# Altium PCB PCB1.PcbDoc (part 1 of 2)
Units mil, origin at the board's own origin, x right, y up, seen from the top; angles counter-clockwise.
Board outline 1023.62 x 2244.09 mil, 2 copper layers (Top Layer, Bottom Layer), stack 42.17 mil thick; 66 components, 139 nets, 332 pads, 153 vias.
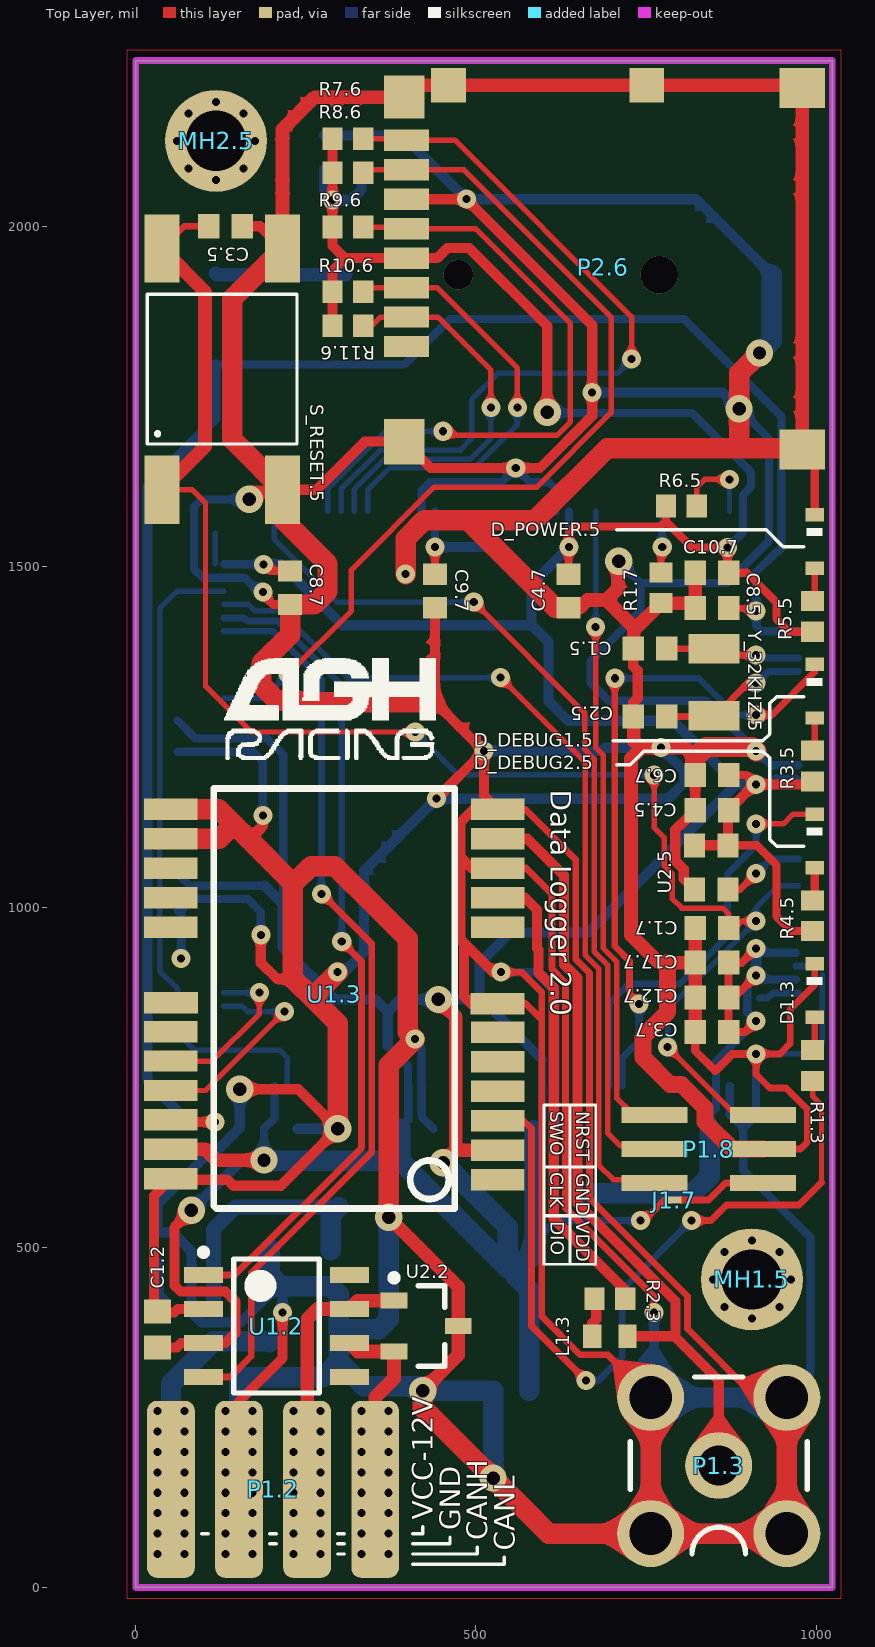
[diagram p0: Top Layer view]
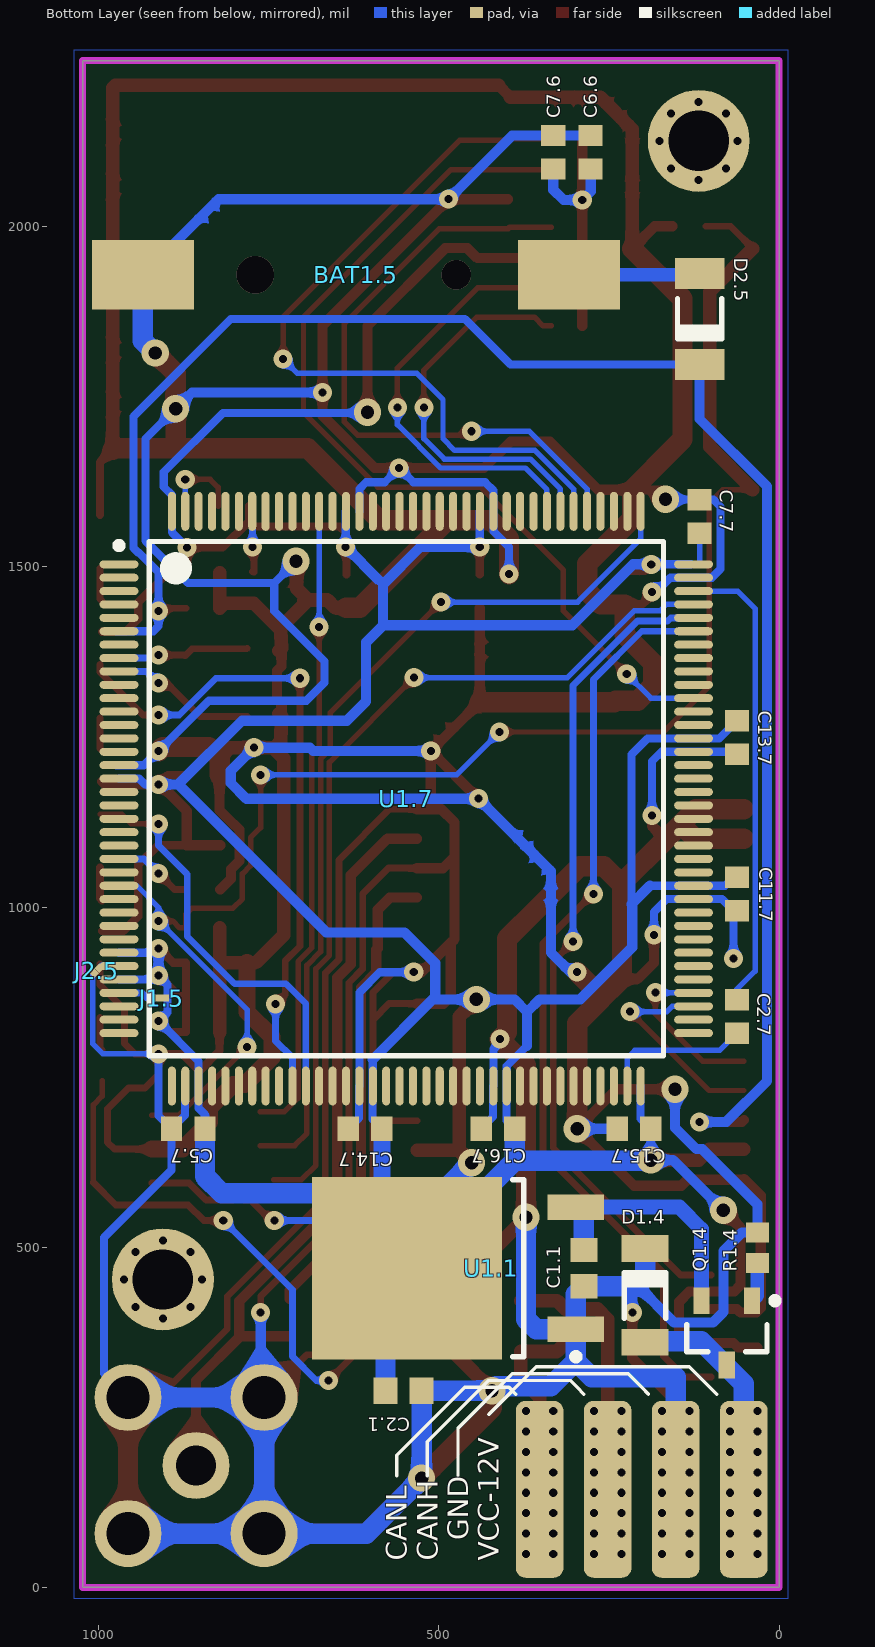
[diagram p1: Bottom Layer view, seen from below]

## Layer stack, top to bottom
Top Solder: solder mask 0.4, Solder Resist, Dk 3.5
Top Layer: signal copper 1.4
Dielectric 1: dielectric 39.3701, FR-4, Dk 4.8
Bottom Layer: signal copper 1.4
Bottom Solder: solder mask 0.4, Solder Resist, Dk 3.5

## Board outline
0,0 1023.62,0 1023.62,2244.09 0,2244.09

## Design rules (kind name [scope] priority, off if disabled: settings)
Clearance [All] p1: gap=10 ignorepadtopadclearanceinfootprint=FALSE except(0: Arc-Hole Track-Hole SMDPad-Hole THPad-Hole Via-Hole Fill-Hole Poly-Hole Region-Hole Text-Hole; 5: Arc-Arc Arc-Track Arc-SMDPad Track-Track Track-SMDPad SMDPad-SMDPad)
ComponentClearance ComponentClearance_1 [IsNetTieComponent] p1: gap=0 collisioncheckmode=3 verticalgap=0 showdistances=FALSE
ComponentClearance [All] p2: gap=10 collisioncheckmode=3 verticalgap=10 showdistances=FALSE
HoleToHoleClearance [All] p1: gap=7 allowstackedmicrovias=TRUE
MinimumSolderMaskSliver [All] p1: minsoldermaskwidth=7
PolygonConnect PolygonConnect_Via [IsVia] p1: connectstyle=Direct reliefconductorwidth=10 reliefentries=4 polygonreliefangle="90 Angle" airgapwidth=10
PolygonConnect PolygonConnect_MH [HasFootprint('MOUNTING HOLE 2mm') or HasFootprint('MOUNTING HOLE 3mm')] p2: connectstyle=Direct reliefconductorwidth=10 reliefentries=4 polygonreliefangle="90 Angle" airgapwidth=10
PolygonConnect [All] p3: connectstyle=Relief reliefconductorwidth=10 reliefentries=4 polygonreliefangle="90 Angle" airgapwidth=10
RoutingVias [All] p1: holewidth=28 width=50 viastyle="Through Hole" minholewidth=28 minwidth=50 maxholewidth=28 maxwidth=50 useviatemplates=TRUE viatemplateguid#1={84326701-4016-4D40-A17F-3868C8D44F5F} viatemplateguid#2={CE5F3209-6210-4098-BA08-8F30989B8E6C} viatemplateguid#3={49E86A22-232E-45D3-8E06-BE319950C1BD} viatemplateguid#4={101CAD5C-0689-4F2F-A512-CBBFEFE64669} viatemplatename#1=v71h30m0mx0 viatemplatename#2=v71h30m71 viatemplatename#3=v102h50m0mx0 viatemplatename#4=v127h70
SilkToSilkClearance [All] p1: silktosilkclearance=3
SilkToSolderMaskClearance [IsPad] p1: minsilkscreentomaskgap=7 clearancetoexposedcopper=TRUE
SolderMaskExpansion [All] p1: expansion=5
Width Width_POWER [InNetClass('POWER')] p1: maxlimit=30 minlimit=8 preferedwidth=15
Width [Not InNetClass('POWER')] p2: maxlimit=20 minlimit=8 preferedwidth=10
25 further rules are at their usual default settings.

## Classes and differential pairs
component class Main: BAT1.5 C1.5 C2.5 C3.5 C4.5 C8.5 D2.5 D_DEBUG1.5 D_DEBUG2.5 D_POWER.5 J1.5 J2.5 MH1.5 MH2.5 R3.5 R4.5 R5.5 R6.5 S_RESET.5 U2.5 Y_32KHZ.5
component class "U_3V3 NCP1117DT33G": C1.1 C2.1 U1.1
component class "U_CAN Transceiver SN65HVD232D": C1.2 P1.2 U1.2 U2.2
component class U_GPS: D1.3 L1.3 P1.3 R1.3 R2.3 U1.3
component class "U_Input Protection": D1.4 Q1.4 R1.4
component class U_MicroSDCard: C6.6 C7.6 P2.6 R7.6 R8.6 R9.6 R10.6 R11.6
component class U_STM32F767ZIT6: C1.7 C2.7 C3.7 C4.7 C5.7 C6.7 C7.7 C8.7 C9.7 C10.7 C11.7 C12.7 C13.7 C14.7 C15.7 C16.7 C17.7 J1.7 R1.7 U1.7
component class "U_SWD Connector": P1.8
net class PA[0..10]: PA0 PA1 PA2 PA3 PA4 PA5 PA6 PA7 PA8 PA9 PA10 PA15
net class PB[0..15]: PB0 PB1 PB2 PB4 PB5 PB6 PB7 PB8 PB9 PB10 PB11 PB12 PB13 PB14 PB15
net class PC[0..13]: PC0 PC1 PC2 PC3 PC4 PC5 PC6 PC7 PC8 PC9 PC10 PC11 PC12 PC13
net class PD[0..15]: PD0 PD1 PD2 PD3 PD4 PD5 PD6 PD7 PD8 PD9 PD10 PD11 PD12 PD13 PD14 PD15
net class PE[0..15]: PE0 PE1 PE2 PE3 PE4 PE5 PE6 PE7 PE8 PE9 PE10 PE11 PE12 PE13 PE14 PE15
net class PF[0..15]: PF0 PF1 PF2 PF3 PF4 PF5 PF6 PF7 PF8 PF9 PF10 PF11 PF12 PF13 PF14 PF15
net class PG[0..15]: PG0 PG1 PG2 PG3 PG4 PG5 PG6 PG7 PG8 PG9 PG10 PG11 PG12 PG13 PG14 PG15
net class POWER: 3V3 GND VBAT VCC VCC_SAFE

## Components (designator, comment, footprint, x,y, rotation, side; value= is the part's Value field where it differs from the comment)
BAT1.5 "Battery" "KEYSTONE 1056" 621.81,1929.25 r0 bottom locked value=3V (schematic designator BAT1)
C1.1 "Cap" CAP_0603_IPC_MD 286.81,469.25 r90 bottom value=10uF (schematic designator C1)
C1.2 "Cap" CAP_0603_IPC_MD 31.81,379.25 r270 top value=100nF (schematic designator C1)
C1.5 "Cap" CAP_0603_IPC_HD 755.81,1380.25 r0 top value=23p (schematic designator C1)
C1.7 "Cap" CAP_0603_IPC_HD 846.81,969.25 r0 top value=100n (schematic designator C1)
C2.1 "Cap" CAP_0603_IPC_MD 551.81,289.25 r0 bottom value=10uF (schematic designator C2)
C2.5 "Cap" CAP_0603_IPC_HD 755.81,1280.25 r0 top value=23p (schematic designator C2)
C2.7 "Cap" CAP_0603_IPC_HD 61.81,839.25 r270 bottom value=2.2uF (schematic designator C2)
C3.5 "Cap" CAP_0603_IPC_HD 132.09,2000.55 r180 top value=100nF (schematic designator C3)
C3.7 "Cap" CAP_0603_IPC_HD 846.81,816.25 r0 top value=100n (schematic designator C3)
C4.5 "Cap" CAP_0603_IPC_HD 846.81,1142.25 r0 top value=100nF (schematic designator C4)
C4.7 "Cap" CAP_0603_IPC_HD 635.81,1464.25 r90 top value=100n (schematic designator C4)
C5.7 "Cap" CAP_0603_IPC_HD 868.2,674.25 r180 bottom value=100n (schematic designator C5)
C6.6 "Cap" CAP_0603_IPC_HD 276.81,2109.25 r270 bottom value=100nF (schematic designator C6)
C6.7 "Cap" CAP_0603_IPC_HD 846.81,1194.25 r0 top value=100n (schematic designator C6)
C7.6 "Cap" CAP_0603_IPC_HD 331.81,2109.25 r270 bottom value=1uF (schematic designator C7)
C7.7 "Cap" CAP_0603_IPC_HD 116.81,1574.25 r270 bottom value=100n (schematic designator C7)
C8.5 "Cap" CAP_0603_IPC_HD 846.81,1439.25 r0 top value=100n (schematic designator C8)
C8.7 "Cap" CAP_0603_IPC_HD 226.81,1469.25 r90 top value=100n (schematic designator C8)
C9.7 "Cap" CAP_0603_IPC_HD 439.81,1464.25 r90 top value=100n (schematic designator C9)
C10.7 "Cap" CAP_0603_IPC_HD 846.81,1491.25 r0 top value=100n (schematic designator C10)
C11.7 "Cap" CAP_0603_IPC_HD 61.81,1019.25 r90 bottom value=100n (schematic designator C11)
C12.7 "Cap" CAP_0603_IPC_HD 846.81,867.25 r0 top value=100n (schematic designator C12)
C13.7 "Cap" CAP_0603_IPC_HD 61.81,1249.25 r90 bottom value=100n (schematic designator C13)
C14.7 "Cap" CAP_0603_IPC_HD 608.2,674.25 r180 bottom value=100n (schematic designator C14)
C15.7 "Cap" CAP_0603_IPC_HD 213.2,674.25 r180 bottom value=100n (schematic designator C15)
C16.7 "Cap" CAP_0603_IPC_HD 413.2,674.25 r180 bottom value=100n (schematic designator C16)
C17.7 "Cap" CAP_0603_IPC_HD 846.81,918.25 r0 top value=100n (schematic designator C17)
D1.3 "LED BLUE" KPA_2106 997.81,877.25 r270 top (schematic designator D_GPS)
D1.4 "TGL34-20CA" DIO_MELF_IPC_MD 196.81,429.25 r270 bottom (schematic designator D1)
D2.5 "Schottky Diode" MiniMELF_IPC_MD 116.81,1864.25 r270 bottom (schematic designator D2)
D_DEBUG1.5 "LED GREEN" KPA_2106 997.81,1317.25 r270 top (schematic designator D_DEBUG1)
D_DEBUG2.5 "LED YELLOW" KPA_2106 997.81,1097.25 r270 top (schematic designator D_DEBUG2)
D_POWER.5 "LED RED" KPA_2106 997.81,1537.25 r270 top (schematic designator D_POWER)
J1.5 "NetTie" NETTIE 906.81,866.25 r0 bottom net-tie (schematic designator J1)
J1.7 "NetTie" NETTIE 791.81,569.25 r0 top net-tie (schematic designator J1)
J2.5 "NetTie" NETTIE 1002.81,906.25 r135 bottom net-tie (schematic designator J2)
L1.3 "Ind" IND_0603_IPC_HD 696.81,369.25 r180 top value=22uH (schematic designator L1)
MH1.5 "Mounting Hole" "MOUNTING HOLE 2mm" 905.51,452.76 r90 top (schematic designator MH1)
MH2.5 "Mounting Hole" "MOUNTING HOLE 2mm" 118.11,2125.98 r90 top (schematic designator MH2)
P1.2 "CAN" WIRE_PADS_4 201.81,144.25 r0 top (schematic designator P1)
P1.3 "SMA Antenna" SMA_PCB_Female_Angle_connector 856.81,179.25 r180 top (schematic designator P1)
P1.8 "SWD" HEADER_2x3_1_27_MALE_SMD 921.81,594.25 r180 top (schematic designator P1)
P2.6 "MicroSD" MICROSDCARD_SOCKET 1012.81,2233.25 r270 top locked (schematic designator P2)
Q1.4 "ZXMP3A13FTA" SOT23_IPC_MD 76.81,374.25 r270 bottom (schematic designator Q1)
R1.3 "Res" RES_0603_IPC_HD 994.81,767.25 r270 top value=1k (schematic designator R1)
R1.4 "Res" RES_0603_IPC_HD 31.81,499.25 r90 bottom value=1k (schematic designator R1)
R1.7 "Res" RES_0603_IPC_HD 771.81,1469.25 r90 top value=10k (schematic designator R1)
R2.3 "Res" RES_0603_IPC_HD 696.81,424.25 r0 top value=22 (schematic designator R2)
R3.5 "Res" RES_0603_IPC_HD 994.81,1207.25 r90 top value=1k (schematic designator R3)
R4.5 "Res" RES_0603_IPC_HD 994.81,987.25 r90 top value=1k (schematic designator R4)
R5.5 "Res" RES_0603_IPC_HD 994.81,1427.25 r270 top value=1k (schematic designator R5)
R6.5 "Res" RES_0603_IPC_HD 801.81,1589.25 r180 top value=1k (schematic designator R6)
R7.6 "Res" RES_0603_IPC_HD 311.81,2129.25 r180 top value=10k (schematic designator R7)
R8.6 "Res" RES_0603_IPC_HD 311.81,2079.25 r180 top value=10k (schematic designator R8)
R9.6 "Res" RES_0603_IPC_HD 311.81,1999.25 r180 top value=10k (schematic designator R9)
R10.6 "Res" RES_0603_IPC_HD 311.81,1904.25 r180 top value=10k (schematic designator R10)
R11.6 "Res" RES_0603_IPC_HD 311.81,1854.25 r180 top value=10k (schematic designator R11)
S_RESET.5 "Switch" Microswitch_SMD_4_3mm 127.09,1790.55 r90 top (schematic designator S_RESET)
U1.1 "NCP1117DT33G" DPAK_IPC_MD 471.81,469.25 r0 bottom locked (schematic designator U1)
U1.2 "SN65HVD232D" SOIC_8_IPC_MD 206.81,384.25 r0 top (schematic designator U1)
U1.3 "GPS NEO-M8" NEO-6M 291.81,864.25 r0 top locked (schematic designator U1)
U1.7 "STM32F767ZIT6" LQFP144_IPC_MD 547.81,1159.25 r180 bottom locked (schematic designator U1)
U2.2 "ESDCAN02-2BWY" SOT23_IPC_MD 426.81,384.25 r0 top (schematic designator U2)
U2.5 "16.00M-IQXO-791" ICLCX18 845.81,1058.25 r270 top (schematic designator U2)
Y_32KHZ.5 "XTAL 32.768kHz" "XTAL 32.768kHz IQD Frequencies" 849.81,1330.25 r270 top (schematic designator Y_32KHZ)

## Footprints (in the part's own frame and the unit in brackets; to place one, negate y for a bottom-side part, rotate by r counter-clockwise, add the part's x,y. Pads: shape width x height; smd on the part's side, far side on the other; paste and mask are expansions set on the pad)
CAP_0603_IPC_HD [mm] "Chip Capacitor, 2-Leads, Body 1,60x0,80mm, IPC High Density"
  rect 0.8x0.9 smd mask+0.102: 1(-0.625,0) 2(0.625,0)
  body extent -0.87,-0.48 0.87,0.48, height 0.95
CAP_0603_IPC_MD [mm] "Chip Capacitor, 2-Leads, Body 1,60x0,80mm, IPC Medium Density"
  rect 0.9x1 smd: 1(-0.675,0) 2(0.675,0)
  body extent -0.87,-0.48 0.87,0.47, height 0.95
DIO_MELF_IPC_MD [mm] "MELF Diode, 2-Leads, Body 3.50x1.53mm, IPC MD"
  rect 1x1.75 smd: 1(-1.75,0) 2(1.75,0)
  silkscreen extent -0.85,-0.77 0.85,0.78, body extent -1.75,-0.76 1.75,0.76, height 1.53
DPAK_IPC_MD [mm] "D-PAK, 3-Pads, Body 6.20x6.66mm (max), IPC Medium Density"
  rect 2.1x0.95 smd: 1(-4.4,2.28) 3(-4.4,-2.28)
  rect 7.1x6.8 smd: 4(1.9,0)
  silkscreen extent -4.52,-3.3 -2.05,3.43, body extent -4.44,-3.3 5.29,3.3, height 2.63
HEADER_2x3_1_27_MALE_SMD [mm]
  rect 2.45x0.6 smd: 1(0,0) 2(4.05,0) 3(0,-1.27) 4(4.05,-1.27) 5(0,-2.54) 6(4.05,-2.54)
  body extent -0.73,-3.17 4.78,0.64, height 6.4
ICLCX18 [mm]
  rect 0.9x0.8 smd: 1(-0.825,-0.625) 2(0.825,-0.625) 3(0.825,0.625) 4(-0.825,0.625)
  body extent -1.25,-1 1.25,1, height 0.8
IND_0603_IPC_HD [mm] "Chip Inductor, 2-Leads, Body 1.60x0.80mm, IPC High Density"
  rect 0.68x0.88 smd: 1(-0.66,0) 2(0.66,0)
  body extent -0.9,-0.47 0.9,0.48, height 0.95
"KEYSTONE 1056" [mm] "KEYSTONE KEYS1056  for  BR1220, CR1220 batteries, 4mm height, SMD"
  rect 3.8x2.6 smd: 1(-7.95,0) 2(7.95,0)
  body extent -9.13,-7.4 9.68,7.35, height 4.23
KPA_2106 [mm]
  rect 0.5x0.7 smd: 1(1,0) 2(-1,0)
  silkscreen extent -0.5,-0.3 -0.2,0.3, body extent -1,-0.25 1,0.75, height 0.6
LQFP144_IPC_MD [mm] "TSQFP, 144-Leads, Body 20.00x20.00mm, Pitch 0.50mm, IPC Medium Density"
  oval 1.45x0.3 smd: 1(-10.725,8.75) 2(-10.725,8.25) 3(-10.725,7.75) 4(-10.725,7.25) 5(-10.725,6.75) 6(-10.725,6.25) 7(-10.725,5.75) 8(-10.725,5.25) 9(-10.725,4.75) 10(-10.725,4.25) 11(-10.725,3.75) 12(-10.725,3.25) 13(-10.725,2.75) 14(-10.725,2.25) 15(-10.725,1.75) 16(-10.725,1.25) 17(-10.725,0.75) 18(-10.725,0.25) 19(-10.725,-0.25) 20(-10.725,-0.75) 21(-10.725,-1.25) 22(-10.725,-1.75) 23(-10.725,-2.25) 24(-10.725,-2.75) 25(-10.725,-3.25) 26(-10.725,-3.75) 27(-10.725,-4.25) 28(-10.725,-4.75) 29(-10.725,-5.25) 30(-10.725,-5.75) 31(-10.725,-6.25) 32(-10.725,-6.75) 33(-10.725,-7.25) 34(-10.725,-7.75) 35(-10.725,-8.25) 36(-10.725,-8.75) 73(10.725,-8.75) 74(10.725,-8.25) 75(10.725,-7.75) 76(10.725,-7.25) 77(10.725,-6.75) 78(10.725,-6.25) 79(10.725,-5.75) 80(10.725,-5.25) 81(10.725,-4.75) 82(10.725,-4.25) 83(10.725,-3.75) 84(10.725,-3.25) 85(10.725,-2.75) 86(10.725,-2.25) 87(10.725,-1.75) 88(10.725,-1.25) 89(10.725,-0.75) 90(10.725,-0.25) 91(10.725,0.25) 92(10.725,0.75) 93(10.725,1.25) 94(10.725,1.75) 95(10.725,2.25) 96(10.725,2.75) 97(10.725,3.25) 98(10.725,3.75) 99(10.725,4.25) 100(10.725,4.75) 101(10.725,5.25) 102(10.725,5.75) 103(10.725,6.25) 104(10.725,6.75) 105(10.725,7.25) 106(10.725,7.75) 107(10.725,8.25) 108(10.725,8.75)
  oval 0.3x1.45 smd: 37(-8.75,-10.725) 38(-8.25,-10.725) 39(-7.75,-10.725) 40(-7.25,-10.725) 41(-6.75,-10.725) 42(-6.25,-10.725) 43(-5.75,-10.725) 44(-5.25,-10.725) 45(-4.75,-10.725) 46(-4.25,-10.725) 47(-3.75,-10.725) 48(-3.25,-10.725) 49(-2.75,-10.725) 50(-2.25,-10.725) 51(-1.75,-10.725) 52(-1.25,-10.725) 53(-0.75,-10.725) 54(-0.25,-10.725) 55(0.25,-10.725) 56(0.75,-10.725) 57(1.25,-10.725) 58(1.75,-10.725) 59(2.25,-10.725) 60(2.75,-10.725) 61(3.25,-10.725) 62(3.75,-10.725) 63(4.25,-10.725) 64(4.75,-10.725) 65(5.25,-10.725) 66(5.75,-10.725) 67(6.25,-10.725) 68(6.75,-10.725) 69(7.25,-10.725) 70(7.75,-10.725) 71(8.25,-10.725) 72(8.75,-10.725) 109(8.75,10.725) 110(8.25,10.725) 111(7.75,10.725) 112(7.25,10.725) 113(6.75,10.725) 114(6.25,10.725) 115(5.75,10.725) 116(5.25,10.725) 117(4.75,10.725) 118(4.25,10.725) 119(3.75,10.725) 120(3.25,10.725) 121(2.75,10.725) 122(2.25,10.725) 123(1.75,10.725) 124(1.25,10.725) 125(0.75,10.725) 126(0.25,10.725) 127(-0.25,10.725) 128(-0.75,10.725) 129(-1.25,10.725) 130(-1.75,10.725) 131(-2.25,10.725) 132(-2.75,10.725) 133(-3.25,10.725) 134(-3.75,10.725) 135(-4.25,10.725) 136(-4.75,10.725) 137(-5.25,10.725) 138(-5.75,10.725) 139(-6.25,10.725) 140(-6.75,10.725) 141(-7.25,10.725) 142(-7.75,10.725) 143(-8.25,10.725) 144(-8.75,10.725)
  silkscreen extent -10.85,-9.6 9.6,9.6, body extent -11,-11 11,11, height 1.6
MICROSDCARD_SOCKET [mm] "MOLEX 502774-0891 - 1.10mm Pitch microSD* Memory Card Connector, Reverse Mount Surface Mount, Push-Push Type"
  rect 0.8x1.68 smd mask+0.051: 1(10.4,-15.61) 2(9.3,-15.61) 3(8.2,-15.61) 4(7.1,-15.61) 5(6,-15.61) 6(4.9,-15.61) 7(3.8,-15.61) 8(2.7,-15.61)
  rect 1.29x1.3 smd mask+0.051: GND(0.645,-6.65)
  rect 1.29x1.3 smd mask+0.025: GND(0.645,-14.05)
  rect 1.5x1.7 smd mask+0.051: GND(0.75,-0.85) GND(14.25,-0.85)
  rect 1.6x1.5 smd mask+0.025: GND(1.09,-15.7)
  rect 1.7x1.5 smd mask+0.051: GND(13.95,-15.7)
  body extent 0.39,-16.19 14.69,-0.19, height 1.83
Microswitch_SMD_4_3mm [mm] "6*6mm vertical type, SMD, height 4.3mm, NINIGI, TACTM-64N-F"
  rect 2.55x1.3 smd: 1(-4.5,2.25) 2(-4.5,-2.25) 3(4.5,2.25) 4(4.5,-2.25)
  silkscreen extent -2.79,-2.79 2.79,2.79, body extent -4.5,-3.1 4.5,3.1, height 4.29
MiniMELF_IPC_MD [mm] "MELF Diode, 2-Leads, Body 3.50x1.65mm, IPC Medium Density"
  rect 1.15x1.85 smd: 1(-1.7,0) 2(1.7,0)
  silkscreen extent -0.75,-0.82 0.75,0.83, body extent -1.75,-0.82 1.75,0.82, height 1.65
"MOUNTING HOLE 2mm" [mm]
  round 3.8 hole 2.25 paste+0 mask+0: MOUNTING(0,0)
NEO-6M [mm] "Modu³: GPS; GPIO, I2C, SPI, UART"
  rect 2x0.8 smd mask+0.051: 1(6.096,-6.731) 2(6.096,-5.631) 3(6.096,-4.531) 4(6.096,-3.431) 5(6.096,-2.331) 6(6.096,-1.231) 8(6.1,2.7) 9(6.1,3.8) 10(6.1,4.9) 11(6.1,6) 12(6.1,7.1) 13(-6.1,7.1) 14(-6.1,6) 15(-6.1,4.9) 16(-6.1,3.8) 17(-6.1,2.7) 19(-6.1,-1.2) 20(-6.1,-2.3) 21(-6.1,-3.4) 22(-6.1,-4.5) 23(-6.1,-5.6) 24(-6.1,-6.7)
  rect 2x0.8 smd mask+0.025: 7(6.092,-0.158) 18(-6.096,-0.127)
  silkscreen extent -4.5,-7.8 4.5,7.87, body extent -5.65,-7.8 5.65,7.8, height 2.64
NETTIE [mil]
  rect 10x10 smd paste+0 mask+0: 1(-5,0) 2(5,0)
RES_0603_IPC_HD [mm] "Chip Resistor, 2-Leads, Body 1,55x0,80mm, IPC High Density"
  rect 0.75x0.85 smd mask+0.102: 1(-0.575,0) 2(0.575,0)
  body extent -0.85,-0.48 0.85,0.48, height 0.55
SMA_PCB_Female_Angle_connector [mm]
  round 2.5 hole 1.5: 1(0,0)
  round 2.5 hole 1.6: 2(-2.54,2.54) 3(2.54,2.54) 4(2.54,-2.54) 5(-2.54,-2.54)
  silkscreen extent -3.3,-3.3 3.3,3.3, body extent -3.16,-3.2 3.16,11, height 10.48
SOIC_8_IPC_MD [mm] "SOIC, 8-Leads, Pitch 1,27mm, IPC Medium Density"
  rect 1.45x0.6 smd: 1(-2.725,1.905) 2(-2.725,0.635) 3(-2.725,-0.635) 4(-2.725,-1.905) 5(2.725,-1.905) 6(2.725,-0.635) 7(2.725,0.635) 8(2.725,1.905)
  silkscreen extent -2.85,-2.5 1.6,2.88, body extent -3,-2.5 3,2.5, height 1.75
SOT23_IPC_MD [mm] "SOT23, 3-Leads, Body 2.90x2.45mm, Pitch 0.95mm, IPC Medium Density"
  rect 1x0.6 smd: 1(-1.2,0.95) 2(-1.2,-0.95) 3(1.2,0)
  silkscreen extent -1.32,-1.5 0.7,1.92, body extent -1.3,-1.5 1.3,1.5, height 1.1
WIRE_PADS_4 [mil] "Wire Pads 2 Footprint"
  rrect40% 70x260 smd: 1(-150,0) 2(-50,0) 3(50,0) 4(150,0)
  rrect40% 70x260 smd far side: 1(-150,0) 2(-50,0) 3(50,0) 4(150,0)
"XTAL 32.768kHz IQD Frequencies" [mm] "2-Leads, Body 1,5x3,20mm"
  rect 1.1x1.9 smd: 1(-1.25,0) 2(1.25,0)
  body extent -1.61,-0.8 1.61,0.72, height 0.91

## Part data
BAT1.5: library part BATT
C1.1 C1.2 C1.5 C1.7 C2.1 C2.5 C2.7 C3.5 C3.7 C4.5 C4.7 C5.7 C6.6 C6.7 C7.6 C7.7 C8.5 C8.7 C9.7 C10.7 C11.7 C12.7 C13.7 C14.7 C15.7 C16.7 C17.7: "Capacitor"
D1.4: "Transil"
D2.5: Manufacturer=VISHAY, Manufacturer Part Number="LL42-GS08 (for MiniMELF)", Supplier=TME
L1.3: "Inductor"
P1.2: library part "Header 4", "Header, 4-Pin"
P1.3: library part "SMA PCB Female Antenna Angle connector", "Gniazdo; SMA; ¿eñskie; k¹towe 90°; 50?; THT; na PCB; teflon; z³ocony", Manufacturer Symbol=5-1814400-1, Manufaturer="TE CONNECTIVITY", Supplier=TME, Supplier Symbol=5-1814400-1
P1.8: library part "Header 6", "Header, 6-Pin"
P2.6: "Micro SD Card Connector"
Q1.4: "P-mosfet"
R1.3 R1.4 R1.7 R2.3 R3.5 R4.5 R5.5 R6.5 R7.6 R8.6 R9.6 R10.6 R11.6: "Resistor"
S_RESET.5: library part Microswitch
U1.1: Manufacturer="ON Semiconductor", Manufacturer Part Number=NCP1117DT33G, Mounting Technology=SMD, Part Number=NCP1117DT33G, Supplier=TME, Supplier Part Number=NCP1117DT33G, Type=IC
U1.2: "3.3V CAN Transceiver with Standby Mode, 17 mA, -40 to 85 degC, 8-pin SOIC (D), Green (RoHS & no Sb/Br)", Manufacturer="Texas Instruments", Manufacturer Part Number=SN65HVD232D, Mounting Technology=SMD, Part Number=SN65HVD232D, Supplier=TME, Supplier Part Number=SN65HVD232D, Type=IC
U1.3: library part "u-blox NEO-M8"
U1.7: "ARM Cortex-M4 32-bit MCU, 2048 KB Flash, 512 KB Internal RAM, 114 I/Os, 144-pin LQFP, -40 to 85 degC, Tray"
U2.2: "ESD CAN protection (2 transils)"
U2.5: "Crystal Clock Oscillator", Manufacturer="IQD FREQUENCY PRODUCTS", MPN=LFSPXO066657CUTT, Name=16.00M-IQXO-791, SPN=16.00M-IQXO-791, Supplier=TME
Y_32KHZ.5: library part "XTAL 32.768kHz 2-pin", "Crystal Oscillator 32.768kHz", Manufacturer="IQD FREQUENCY PRODUCTS", Manufacturer Symbol=32.768K-CFPX217, Spplier Symbol=32.768K-85SMXR, Supplier=TME

## Via types
v1: diameter 23, hole 11.81, Top Layer to Bottom Layer, 64 vias
v2: diameter 28, hole 11.81, Top Layer to Bottom Layer, tented both sides, 57 vias
v3: diameter 28, hole 11.81, Top Layer to Bottom Layer, 16 vias
v4: diameter 40, hole 19.68, Top Layer to Bottom Layer, tented both sides, 14 vias
v5: diameter 43.31, hole 43.31, Top Layer to Bottom Layer, tented both sides, 1 vias
v6: diameter 55.12, hole 55.12, Top Layer to Bottom Layer, tented both sides, 1 vias

## Nets (pads, with @x,y where several pads share a name; then routed paths per layer and width w, separated by ;. In a path a pad name is that pad's centre, name@x,y a point inside that pad or via, vN(x,y) a via of type N, cw(c..) or ccw(c..) an arc to the next point about the centre after c; other vN are vias at no path point)
3V3: C1.2.2 C2.1.2 C3.7.2 C4.5.2 C4.7.2 C5.7.2 C6.6.2 C6.7.2 C7.6.2 C7.7.2 C8.7.2 C9.7.2 C10.7.2 C11.7.2 C12.7.2 C13.7.2 C14.7.2 C15.7.2 C16.7.2 C17.7.2 J1.5.1 J1.7.1 P2.6.4 R3.5.1 R4.5.1 R5.5.2 R6.5.2 R7.6.2 R8.6.2 R9.6.2 R10.6.2 R11.6.2 U1.1.4 U1.2.3 U1.3.2 U1.3.23 U1.7.17 U1.7.30 U1.7.32 U1.7.39 U1.7.52 U1.7.62 U1.7.72 U1.7.84 U1.7.95 U1.7.108 U1.7.121 U1.7.131 U1.7.144 U2.5.1 U2.5.4 | length 9308.9
  Top Layer w10: v2(741.81,539.25) 746.81,544.25 751.81,544.25 776.81,569.25 J1.7.1@786.81,569.25
  Top Layer w12: v2(187.81,1503.74) 197.69,1493.86 C8.7.2@226.81,1493.86 ; C9.7.2@439.81,1488.86 v2(439.81,1529.25) ; C4.7.2@635.81,1488.86 635.81,1519.25 630.81,1524.25 636.81,1530.25 636.81,1550.25 645.81,1559.25 771.54,1559.25 779.17,1566.89 ; R6.5.2@779.17,1589.25 779.17,1566.89 ; U2.5.4@870.42,1090.73 912.76,1090.73 941.81,1061.68 941.81,986.25 963.45,964.61 R4.5.1@994.81,964.61 ; C6.7.2@871.42,1194.25 897.81,1194.25 v2(911.81,1180.25) ; C12.7.2@871.81,869.25 881.81,869.25 v2(911.81,899.25) ; v2(911.81,832.25) 895.81,816.25 C3.7.2@871.42,816.25 C12.7.2@871.42,867.25 C17.7.2@871.42,918.25 890.81,918.25 v2(911.81,939.25) ; R5.5.2@994.81,1404.61 960.45,1404.61 941.81,1423.25 941.81,1447.68 898.24,1491.25 C10.7.2@871.42,1491.25 871.81,1491.65 869.81,1493.65 v2(869.81,1528.25) 817.82,1528.25 779.19,1566.89
  Top Layer w15: C1.2.2@31.81,352.68 60.24,352.68 66.81,359.25 U1.2.3@99.53,359.25 131.81,359.25 146.81,374.25 146.81,420 131.87,434.94 65.81,434.94 56.81,443.94 56.81,529.25 v4(81.81,554.25) ; R11.6.2@289.17,1854.25 R10.6.2@289.17,1904.25 289.17,1935.56 307.34,1953.72 ; R7.6.2@289.17,2129.25 R8.6.2@289.17,2079.25 v2(289.17,2039.25) R9.6.2@289.17,1999.25 289.17,1971.89 307.34,1953.72 ; v4(604.81,1727.25) 604.81,1853.99 490.39,1968.41 457.96,1968.41 443.27,1953.72 P2.6.4@398.24,1953.72 307.34,1953.72 ; U2.5.1@821.2,1090.73 U2.5.4@870.42,1090.73 870.42,1141.25 C4.5.2@871.42,1142.25 909.42,1180.25 v2(911.81,1180.25) 990.45,1180.25 R3.5.1@994.81,1184.61
  Top Layer w20: U1.3.23@51.65,643.78 102.28,643.78 118.01,628.05 v4(188.6,628.05) ; v4(444.81,864.25) 470.12,838.95 470.12,642.56 ; v4(451.81,624.25) 470.12,642.56 ; U1.3.2@531.81,642.56 470.12,642.56
  Bottom Layer w8: U1.7.108@116.81,1504.25 C7.7.2@116.81,1549.65 ; U1.7.121@439.54,1581.5 U1.7.121@439.81,1581.23 ; v2@446.81,1529.25 v2@446.81,1535.98 ; U1.7.131@636.39,1581.5 U1.7.131@636.81,1581.08 ; U1.7.17@970.06,1188.78 U1.7.17@974.06,1188.78
  Bottom Layer w10: U1.1.4@546.61,469.25 583.6,506.24 616.61,539.25 v2(741.81,539.25)
  Bottom Layer w12: C13.7.2@61.81,1273.86 87.83,1247.83 U1.7.95@125.57,1247.83 ; C11.7.2@66.81,1043.86 79.37,1031.3 U1.7.84@125.57,1031.3 ; U1.7.84@129.57,1031.3 189.76,1031.3 ; U1.7.95@129.57,1247.83 193.23,1247.83 216.81,1224.25 216.81,1004.25 ; U1.7.108@129.57,1503.74 v2(187.81,1503.74) ; v4@187.81,627.27 v4(188.6,628.05) C15.7.2@188.6,674.25 203.72,689.37 U1.7.72@203.72,737.01 ; 370.31,796.2 400.17,766.34 U1.7.62@400.17,737.01 ; C16.7.2@400.57,686.22 U1.7.62@400.57,737.01 ; v2(439.81,1529.25) U1.7.121@439.81,1581.23 ; U1.7.52@597.02,737.01 597.02,776.04 ; C14.7.2@597.42,688.07 U1.7.52@597.42,737.01 ; v4(604.81,1727.25) 605.81,1726.25 817.24,1726.25 904.2,1639.28 904.2,1617.61 892.3,1605.71 U1.7.144@892.3,1581.5 892.3,1550.74 v2(869.81,1528.25) ; v2(636.81,1529.25) U1.7.131@636.81,1581.08 ; C5.7.2@843.6,674.25 843.6,695.04 852.93,704.37 U1.7.39@852.93,737.01 852.93,773.37 v2(911.81,832.25) 898.81,845.25 898.81,886.25 v2(911.81,899.25) 917.56,893.5 U1.7.32@970.06,893.5 ; v2(911.81,939.25) 918.19,932.87 U1.7.30@970.06,932.87 ; v2(911.81,1180.25) 931.81,1180.25 940.34,1188.78 U1.7.17@970.06,1188.78
  Bottom Layer w15: v4(81.81,554.25) 155.61,628.05 v4(188.6,628.05) ; v2(187.81,1503.74) 214.32,1503.74 303.81,1414.25 581.81,1414.25 ; 189.76,1031.3 216.81,1004.25 ; 215.81,1005.25 215.81,940.7 292.26,864.25 351.81,864.25 370.31,845.75 ; C6.6.2@276.81,2084.65 276.81,2051.61 v2(289.17,2039.25) 316.81,2039.25 331.81,2054.25 C7.6.2@331.81,2084.65 ; 370.31,796.2 370.31,845.75 ; v2(439.81,1529.25) 446.81,1529.25 526.81,1529.25 581.81,1474.25 581.81,1414.25 ; 587.31,1479.75 v2(636.81,1529.25) v2@636.81,1523.7 ; 597.02,776.04 508.81,864.25 ; 843.6,604.04 843.81,604.25 ; v2(911.81,899.25) v2(911.81,939.25) ; v2@911.81,1184.7 v2(911.81,1180.25) 882.81,1180.25 ; 370.31,845.75 388.81,864.25 v4(444.81,864.25) 508.81,864.25 ; 508.81,864.25 505.31,867.75 505.31,917.3 550.81,962.8 665.36,962.8 882.81,1180.25 ; 581.81,1414.25 606.81,1389.25 606.81,1302.25 635.31,1273.75 789.31,1273.75 882.81,1180.25
  Bottom Layer w25: U1.1.4@546.61,469.25 557.71,458.15 583.6,484.04 583.6,506.24 C14.7.2@583.6,674.25
  Bottom Layer w30: v4@187.81,627.27 388.6,627.27 ; C16.7.2@388.6,674.25 388.6,627.27 ; v4(451.81,624.25) 546.61,529.45 U1.1.4@546.61,469.25 388.6,627.27 ; U1.1.4@557.71,458.15 578.39,437.48 C2.1.2@578.39,289.25 ; U1.1.4@583.6,506.24 U1.1.4@587.2,509.84 ; U1.1.4@656.61,579.25 818.81,579.25 843.6,604.04 C5.7.2@843.6,674.25
AGND: J2.5.2 U1.7.31 | length 25.8
  Bottom Layer w10: U1.7.31@970.06,913.19 J2.5.2@995.87,913.19
CAN_RX: U1.2.4 U1.7.103 | length 1354.6
  Top Layer w10: U1.2.4@99.53,309.25 139.13,309.25 169.81,339.93 169.81,462.25 346.81,639.25 346.81,946.26 273.82,1019.25 v2(272.81,1019.25)
  Bottom Layer w10: U1.7.103@129.57,1405.32 201.76,1405.32 272.81,1334.26 v2(272.81,1019.25)
CAN_TX: U1.2.1 U1.7.104 | length 1215.5
  Top Layer w10: U1.2.1@99.53,459.25 144.89,459.25 331.81,646.18 331.81,920.25 v2(302.81,949.25)
  Bottom Layer w10: U1.7.104@129.57,1425 159.15,1425 163.84,1420.32 207.97,1420.32 302.81,1325.48 v2(302.81,949.25)
CANH: P1.2.3 U1.2.7 U2.2.1 | length 389.1
  Top Layer w20: P1.2.3@251.81,144.25 251.81,394.25 266.81,409.25 U1.2.7@314.09,409.25 326.5,421.65 U2.2.1@379.57,421.65
  other v1: 231.81,49.25 271.81,49.25 231.81,79.25 271.81,79.25 231.81,109.25 271.81,109.25 231.81,139.25 271.81,139.25 231.81,169.25 271.81,169.25 231.81,199.25 271.81,199.25 231.81,229.25 271.81,229.25 231.81,259.25 271.81,259.25
CANL: P1.2.4 U1.2.6 U2.2.2 | length 284.7
  Top Layer w20: U1.2.6@314.09,359.25 326.5,346.85 U2.2.2@379.57,346.85 379.57,307.01 351.81,279.25 P1.2.4@351.81,144.25
  other v1: 331.81,49.25 371.81,49.25 331.81,79.25 371.81,79.25 331.81,109.25 371.81,109.25 331.81,139.25 371.81,139.25 331.81,169.25 371.81,169.25 331.81,199.25 371.81,199.25 331.81,229.25 371.81,229.25 331.81,259.25 371.81,259.25